# Altium PCB ESP8266SWITCHER.PcbDoc
Units mm, origin at the board's own origin, x right, y up, seen from the top; angles counter-clockwise.
Board outline 85 x 40 mm, 2 copper layers (Top Layer, Bottom Layer); 26 components, 25 nets, 96 pads, 49 vias.
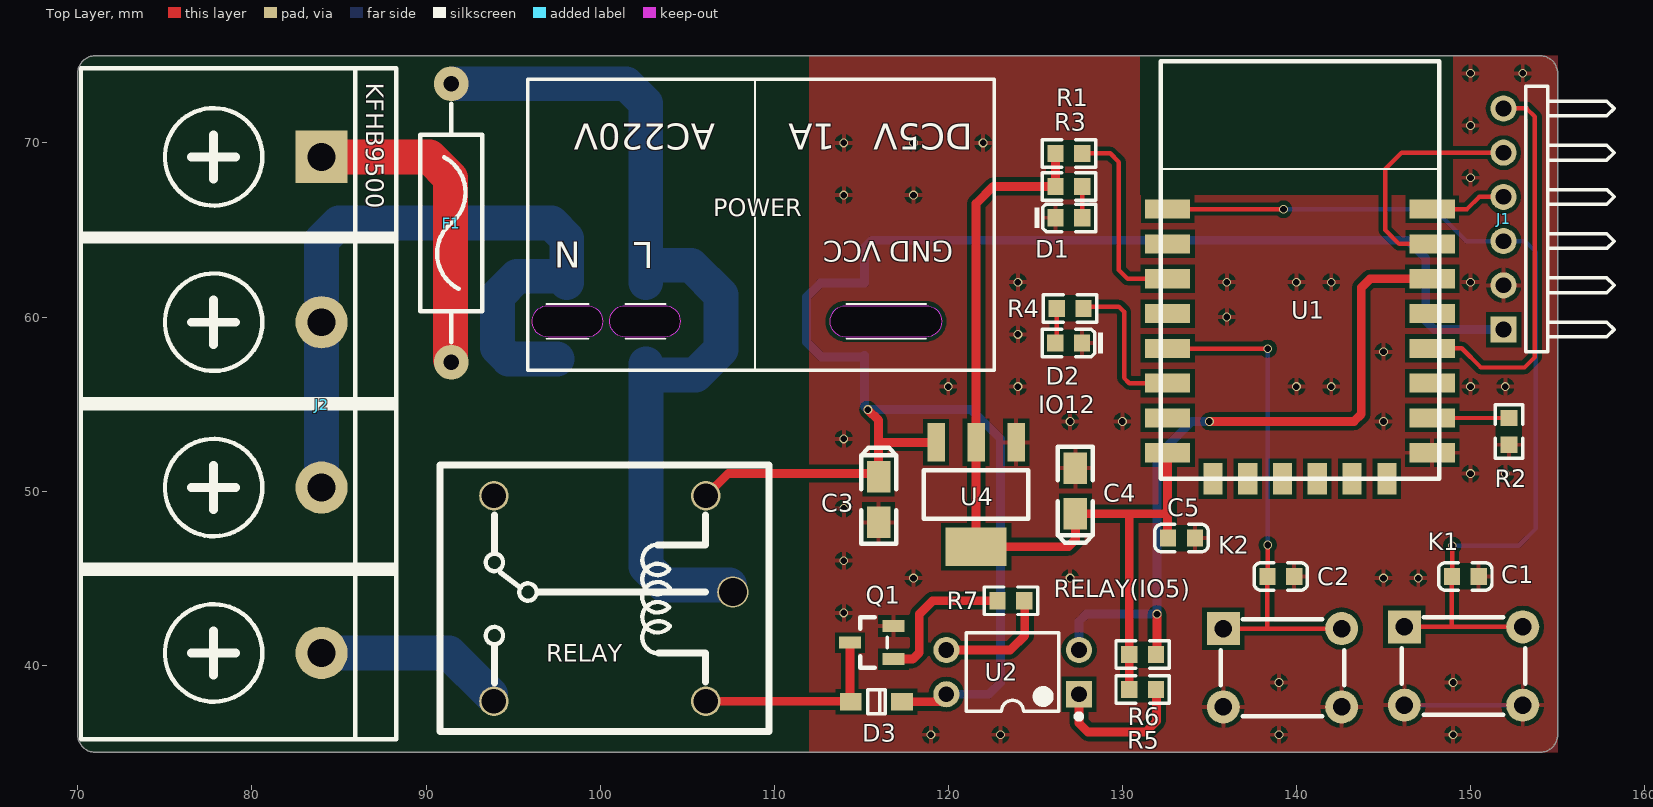
[diagram p0: Top Layer view]
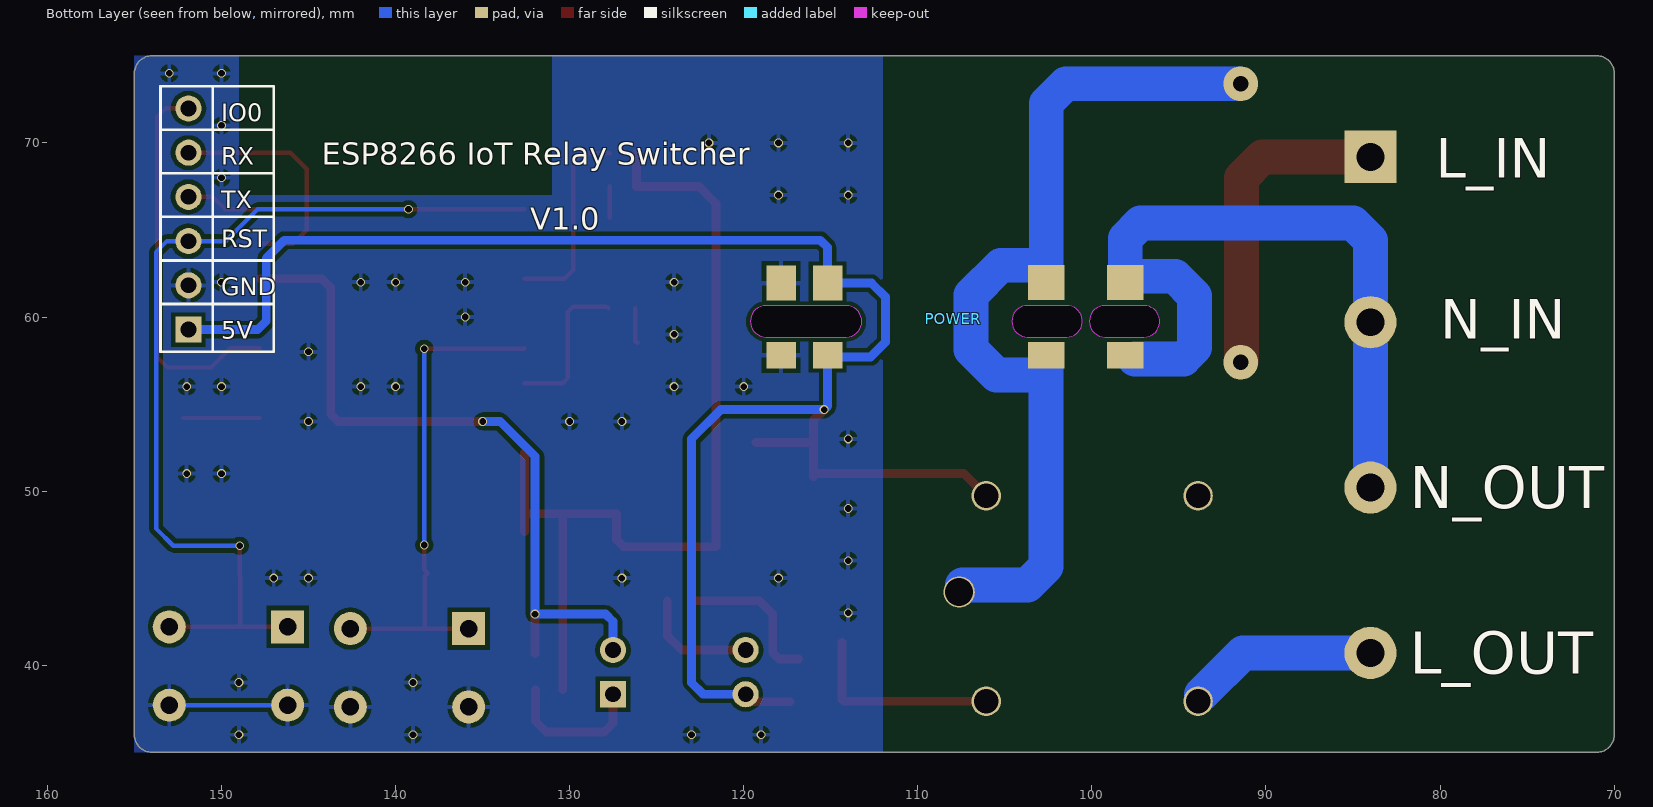
[diagram p1: Bottom Layer view, seen from below]

## Layer stack, top to bottom
Top Solder: solder mask 0.0102, Solder Resist, Dk 3.5
Top Layer: signal copper 0.0356
Dielectric 1: dielectric 0.32, FR-4, Dk 4.8
Bottom Layer: signal copper 0.0356
Bottom Solder: solder mask 0.0102, Solder Resist, Dk 3.5

## Board outline
70,35.888 ccw(c71,36) 70.888,35 70.9,35 154.1,35 154.112,35 ccw(c154,36) 155,35.888 155,74.112 ccw(c154,74) 154.112,75 154.1,75 70.9,75 70.888,75 ccw(c71,74) 70,74.112 70,74.1

## Design rules (kind name [scope] priority, off if disabled: settings)
Clearance [All] p1: gap=0.254 ignorepadtopadclearanceinfootprint=FALSE except(0: Arc-Hole Track-Hole SMDPad-Hole THPad-Hole Via-Hole Fill-Hole Poly-Hole Region-Hole Text-Hole)
PolygonConnect [All] p1: connectstyle=Relief reliefconductorwidth=0.254 reliefentries=4 polygonreliefangle="90 Angle" airgapwidth=0.254
RoutingVias [All] p1: holewidth=0.711 width=1.27 viastyle="Through Hole" minholewidth=0.711 minwidth=1.27 maxholewidth=0.711 maxwidth=1.27
SolderMaskExpansion [All] p1: expansion=0.102
Width [All] p1: maxlimit=2 minlimit=0.254 preferedwidth=0.254
30 further rules are at their usual default settings.

## Components (designator, comment, footprint, x,y, rotation, side; value= is the part's Value field where it differs from the comment)
C1 "100nF (104) 10% 50V" LC-0603_C 149.7,45.1 r0 top
C2 "100nF (104) 10% 50V" LC-0603_C 139.1,45.1 r0 top
C3 "10uF (106) ±10% 16V" LC-CASE-A_3216 116,49.51 r90 top
C4 "10uF (106) ±10% 16V" LC-CASE-A_3216 127.3,50.01 r270 top
C5 "100nF (104) 10% 50V" LC-0603_C 133.4,47.299 r180 top
D1 "红灯 0603" LC-0603_LED_S1 126.93,65.7 r0 top
D2 "绿灯 0603" LC-0603_LED_S1 126.92,58.51 r180 top
D3 "1N4148W" SOD-123 115.87,37.9 r180 top
F1 "FUSE" FUSE-4X16 91.45,57.4 r90 top
J1 "Pin HDR1X6" "Pin HDR1X6/2.54mm-W" 151.9,59.28 r90 top
J2 "KFHB9500-4P" KFHB9500-4P 84,69.2 r270 top
K1 "KEY" DIP-6X6X7 146.2,42.2 r0 top
K2 "KEY" DIP-6X6X7 135.8,42.1 r0 top
POWER "220V~5V" RPD220V-5V-1A 108.4,64 r180 top locked
Q1 "SS8050 Y1" SOT-23(SOT-23-3) 115.6,41.3 r0 top
R1 "10KΩ (1002) ±1%" LC-0603_R 126.93,69.4 r0 top
R2 "10KΩ (1002) ±1%" LC-0603_R 152.2,53.43 r270 top
R3 "10KΩ (1002) ±1%" LC-0603_R 126.93,67.5 r0 top
R4 "10KΩ (1002) ±1%" LC-0603_R 127,60.5 r180 top
R5 "1KΩ (1001) ±1%" LC-0603_R 131.17,38.6 r0 top
R6 "10KΩ (1002) ±1%" LC-0603_R 131.17,40.603 r180 top
R7 "1KΩ (1001) ±1%" LC-0603_R 123.6,43.7 r180 top
RELAY "RELAY" TONGLING-5V 99.8,44.2 r0 top
U1 "12E&F" ESP8266-12E&F 139.922,61.415 r0 top locked
U2 "PC817C" DIP-4 123.7,39.6 r180 top
U4 "NCP1117ST33T3G" SOT-223 121.6,49.8 r90 top

## Footprints (in the part's own frame and the unit in brackets; to place one, negate y for a bottom-side part, rotate by r counter-clockwise, add the part's x,y. Pads: shape width x height; smd on the part's side, far side on the other; paste and mask are expansions set on the pad)
DIP-4 [mm]
  rect 1.5x1.5 hole 0.9: 1(-3.81,1.27)
  round 1.5 hole 0.9: 2(-3.81,-1.27) 3(3.81,-1.27) 4(3.81,1.27)
  silkscreen extent -3.95,-2.25 2.66,2.7, body extent -4,-2.67 4,2.87, height 4.31
DIP-6X6X7 [mm]
  rect 1.9x1.9 hole 1: 1(0,0)
  round 1.9 hole 1: 1(6.8,0) 3(0,-4.5) 3(6.8,-4.5)
  silkscreen extent -0.16,-5.04 6.96,0.54, body extent -0.68,-5.21 7.53,0.79, height 6.95
ESP8266-12E&F [mm]
  rect 2.6x1.1 smd: 1(-7.322,4.785) 2(-7.322,2.785) 3(-7.322,0.785) 4(-7.322,-1.215) 5(-7.322,-3.215) 6(-7.322,-5.215) 7(-7.322,-7.215) 8(-7.322,-9.215) 15(7.878,-9.215) 16(7.878,-7.215) 17(7.878,-5.215) 18(7.878,-3.215) 19(7.878,-1.215) 20(7.878,0.785) 21(7.878,2.785) 22(7.878,4.785)
  rect 1.1x1.8 smd: 9(-4.722,-10.715) 10(-2.722,-10.715) 11(-0.722,-10.715) 12(1.278,-10.715) 13(3.278,-10.715) 14(5.278,-10.715)
  silkscreen extent -7.72,-10.71 8.28,13.28, body extent -7.8,-10.79 8.2,13.59, height 3.06
FUSE-4X16 [mm]
  round 2 hole 0.9: 1(0,0) 2(16,0)
  silkscreen extent 1.14,-1.78 14.86,1.78, body extent -0.43,-1.87 16.17,2.03, height 3.95
KFHB9500-4P [mm]
  rect 3x3 hole 1.6: 1(0,0)
  round 3 hole 1.6: 2(9.5,0) 3(19,0) 4(28.5,0)
  silkscreen extent -5.08,-13.82 33.45,4.3, body extent -5.21,-13.7 33.29,4.3, height 14.05
LC-0603_C [mm]
  rect 0.93x0.98 smd: 1(-0.77,0) 2(0.77,0)
  silkscreen extent -1.53,-0.79 1.54,0.79, body extent -0.8,-0.4 0.8,0.4, height 0.3
LC-0603_LED_S1 [mm]
  rect 0.93x0.98 smd: A(0.77,0) K(-0.77,0)
  silkscreen extent -1.97,-0.79 1.54,0.79, body extent -0.8,-0.4 0.8,0.4, height 0.6
LC-0603_R [mm]
  rect 0.93x0.98 smd: 1(-0.77,0) 2(0.77,0)
  silkscreen extent -1.53,-0.79 1.54,0.79, body extent -0.85,-0.4 0.85,0.4, height 0.56
LC-CASE-A_3216 [mm]
  rect 1.8x1.35 smd: 1(1.31,0) 2(-1.31,0)
  silkscreen extent -2.54,-1 2.97,1, body extent -1.7,-0.84 1.7,0.84, height 1.71
"Pin HDR1X6/2.54mm-W" [mm] "Connector; Header; 6 Position; Right Angle"
  rect 1.5x1.5 hole 0.9: 1(0,0)
  round 1.5 hole 0.9: 2(2.54,0) 3(5.08,0) 4(7.62,0) 5(10.16,0) 6(12.7,0)
  silkscreen extent -1.27,-6.35 13.97,-1.27, body extent -1.27,-9.97 13.97,0.38, height 2.54
RPD220V-5V-1A [mm]
  rect 1.7x2 smd far side mask+0.102: GND(-9.45,2.05) VCC(-6.78,2.05)
  rect 1.7x1.5 smd far side mask+0.102: GND(-9.45,6.2) VCC(-6.78,6.2)
  rect 2.1x1.5 smd far side mask+0.102: L(5.77,6.2) N(10.32,6.2)
  rect 2.1x2 smd far side mask+0.102: L(5.775,2.025) N(10.315,2.025)
  Keep-Out Layer board cut-out: -10.33,3.35 -10.776,3.474 -11.101,3.803 -11.22,4.25 -11.101,4.697 -10.776,5.026 -10.33,5.15 -10.33,5.15 -10.33,5.15 -5.7,5.15 -5.254,5.026 -4.929,4.697 -4.81,4.25 -4.929,3.803 -5.254,3.474 -5.7,3.35 -5.7,3.35 -5.7,3.35
  Keep-Out Layer board cut-out: 4.7,3.34 4.249,3.463 3.919,3.794 3.799,4.245 3.919,4.696 4.249,5.027 4.7,5.15 4.7,5.15 6.95,5.15 7.343,5.06 7.658,4.809 7.832,4.446 7.832,4.044 7.658,3.681 7.343,3.43 6.95,3.34 6.95,3.34
  Keep-Out Layer board cut-out: 9.14,3.35 8.694,3.474 8.369,3.803 8.25,4.25 8.369,4.697 8.694,5.026 9.14,5.15 9.14,5.15 11.39,5.15 11.39,5.15 11.784,5.064 12.101,4.815 12.277,4.452 12.277,4.048 12.101,3.685 11.784,3.436 11.39,3.35 11.39,3.35
  silkscreen extent -14.25,-9.65 12.55,7.05, body extent -14.34,-10.65 12.66,6.85, height 16.85
SOD-123 [mm]
  rect 1.25x1 smd: 1(1.475,0) 2(-1.475,0)
  silkscreen extent -0.5,-0.7 0.5,0.7, body extent -1.85,-0.77 1.85,0.78, height 1.35
SOT-23(SOT-23-3) [mm]
  rect 1.25x0.7 smd: 1(1.25,-0.95) 2(1.25,0.95) 3(-1.25,0)
  silkscreen extent -0.65,-1.46 0.9,1.46, body extent -1.5,-1.5 1.5,1.5, height 1.3
SOT-223 [mm]
  rect 2.2x1 smd: 1(3,-2.3) 2(3,0) 3(3,2.3)
  rect 2.2x3.5 smd: 2(-3,0)
  silkscreen extent -1.4,-3 1.4,3, body extent -3.49,-3.24 3.49,3.24, height 1.64
TONGLING-5V [mm]
  round 1.7 hole 1.4: G(6.275,-6.275) NC(-5.9,5.525) NO(-5.9,-6.275) V(6.275,5.525)
  round 1.8 hole 1.6: S(7.825,0)
  silkscreen extent -9,-8 9.9,7.3, body extent -8.98,-7.97 10.02,7.13, height 15

## Part data
C1 C2 C5: library part "0603 100nF (104) 10% 50V", "贴片电容", Package=0603, SuppliersPartNumber=C14663, ComponentLink1Description=供应商链接, ComponentLink1URL=http://www.szlcsc.com/product/details_15331.html, Supplier=LC
C3 C4: library part "3216 10uF (106) 10% 16V", "钽电容", Package=3216, SuppliersPartNumber=C7171, ComponentLink1Description=供应商链接, ComponentLink1URL=http://www.szlcsc.com/product/details_7643.html, Supplier=LC
D1: library part "0603 红灯", "发光二极管", Package=0603, SuppliersPartNumber=C2286, ComponentLink1Description=供应商链接, ComponentLink1URL=http://www.szlcsc.com/product/details_2659.html, Supplier=LC
D2: library part "0603 绿灯", "发光二极管", Package=0603, SuppliersPartNumber=C72043, ComponentLink1Description=供应商链接, ComponentLink1URL=http://www.szlcsc.com/product/details_73152.html, Supplier=LC
D3: library part 1N4148_SOD-123, "二极管", ComponentLink1Description=供应商链接, ComponentLink1URL=https://item.szlcsc.com/116348.html, 供应商=嘉立创, 供应商编号=C115103, 封装=SOD-123
POWER: library part 瑞普达220V转5V-1A
Q1: library part "SOT-23 SS8050 Y1", "三极管", Package=SOT-23, SuppliersPartNumber=C2150, ComponentLink1Description=供应商链接, ComponentLink1URL=http://www.szlcsc.com/product/details_2507.html, Supplier=LC
R1 R2 R3 R4 R6: library part "0603 10KΩ (1002) 1%", "贴片电阻", Package=0603, SuppliersPartNumber=C25804, ComponentLink1Description=供应商链接, ComponentLink1URL=http://www.szlcsc.com/product/details_26547.html, Supplier=LC
R5 R7: library part "0603 1KΩ (1001) 1%", "贴片电阻", Package=0603, SuppliersPartNumber=C21190, ComponentLink1Description=供应商链接, ComponentLink1URL=http://www.szlcsc.com/product/details_21904.html, Supplier=LC
RELAY: library part TONGLING-RELAY-5V, "5V 一组转换 JQC-3FF-S-Z", 购买链接=https://item.taobao.com/item.htm?spm=a1z10.1-c.w4004-18430098939.12.77ac2a94UoBjtF&id=542806001990
U1: library part ESP8266-12E&F
U2: library part "PC817C DIP4", "PC817C  光耦", ComponentLink2Description=供应商链接, ComponentLink2URL=https://item.szlcsc.com/116748.html, 供应商=嘉立创, 供应商编号=C115500, 封装=DIP-4
U4: "NCP1117, NCV1117. 1.0 A Low-Dropout Positive  Fixed and Adjustable  Voltage Regulators", ComponentLink1Description=供应商链接, ComponentLink1URL=https://item.szlcsc.com/27282.html, 供应商=嘉立创, 供应商编号=C26537, 封装=SOT-223

## Via types
v1: diameter 0.508, hole 0.381, Top Layer to Bottom Layer, tented both sides, 49 vias

## Nets (pads, with @x,y where several pads share a name; then routed paths per layer and width w, separated by ;. In a path a pad name is that pad's centre, name@x,y a point inside that pad or via, vN(x,y) a via of type N, cw(c..) or ccw(c..) an arc to the next point about the centre after c; other vN are vias at no path point)
GND: C1.2 C2.2 C3.2 C4.2 C5.1 D1.K D2.K J1.2 K1.3 K2.3 POWER.GND Q1.2 R2.2 U1.15 U4.1 | length 6.8
  Bottom Layer w0.254: K1.3@146.2,37.7 K1.3@153,37.7
  other v1: 119,36 123,36 139,36 149,36 139,39 149,39 114,43 118,45 127,45 145,45 147,45 114,46 114,49 150,51 152,51 114,53 127,54 130,54 145,54 120,56 124,56 140,56 142,56 150,56 152,56 145,58 124,59 136,60 124,62 136,62 140,62 142,62 150,62 114,67 118,67 150,68 114,70 118,70 122,70 150,71 150,74 153,74
IO0: J1.6 U1.18 | length 22.4
  Top Layer w0.254: U1.18 149.5,58.2 150.6,57.1 153.1,57.1 153.7,57.7 153.7,71.5 153.22,71.98 J1.6
IO2: U1.17
IO4: U1.19
IO5: R6.1 U1.20 U2.2 | length 42
  Top Layer w0.254: R6.1 R6.1@131.99,40.653 ; 143.3,54 143.31,54.01
  Top Layer w0.508: R6.1@131.99,40.653 v1(131.99,42.93) ; v1(135,54) 136.35,54 143.3,54 ; 143.31,54.01 143.72,54.42 143.72,61.69 144.23,62.2 U1.20
  Bottom Layer w0.508: U2.2 127.51,42.51 127.93,42.93 v1(131.99,42.93) 131.99,51.99 134,54 v1(135,54)
IO12: R4.1 U1.6 | length 8.9
  Top Layer w0.254: R4.1 127.87,60.6 129.8,60.6 130.1,60.3 130.1,56.5 130.4,56.2 U1.6
IO13: U1.7
IO14: C2.1 K2.1 U1.5 | length 28.8
  Top Layer w0.254: U1.5 132.62,58.18 v1(138.35,58.18) ; K2.1@135.8,42.1 138.32,42.1 ; v1(138.35,46.9) 138.35,45.48 138.15,45.28 C2.1 138.33,42.11 138.32,42.1 ; K2.1@142.6,42.1 138.32,42.1
  Bottom Layer w0.254: v1(138.35,46.9) v1(138.35,58.18)
IO15: R2.1 U1.16 | length 4.4
  Top Layer w0.254: U1.16 R2.1
KEY1: C1.1 J1.3 K1.1 U1.1 | length 54.8
  Top Layer w0.254: U1.1 139.25,66.2 v1(139.26,66.19) ; K1.1@146.2,42.2 148.89,42.2 ; v1(148.95,46.86) 148.95,45.12 C1.1 148.93,42.24 148.89,42.2 ; K1.1@153,42.2 148.89,42.2
  Bottom Layer w0.254: v1(139.26,66.19) 147.93,66.19 149.76,64.36 J1.3 153.13,64.36 153.76,63.73 153.76,47.85 152.77,46.86 v1(148.95,46.86)
L: F1.1 J2.1 | length 18.3
  Top Layer w2: J2.1 90.2,69.2 91.41,67.99 F1.1@91.41,57.56
L_IN: F1.2 POWER.L RELAY.S | length 50.4
  Bottom Layer w2: F1.2@91.6,73.4 101.5,73.4 102.625,72.275 POWER.L@102.625,61.975 ; POWER.L@102.63,57.31 102.63,45.67 103.7,44.6 RELAY.S@107.425,44.6 ; 102.94,56.67 105.48,56.67 106.94,58.13 106.94,61.27 105.24,62.97 POWER.L@103.62,62.97
L_OUT: J2.4 RELAY.NO | length 10.7
  Bottom Layer w2: J2.4 91.325,40.7 RELAY.NO@93.7,38.325
N: J2.2 J2.3 POWER.N | length 42.9
  Bottom Layer w2: J2.3 J2.2 84,64.4 85,65.4 97.2,65.4 98.085,64.515 98.085,61.975 97.72,62.34 95.23,62.34 94.1,61.21 94.1,58.24 94.745,57.595 POWER.N@97.525,57.595
NetD1_A: D1.A R3.2 | length 1.8
  Top Layer w0.254: D1.A R3.2
NetD2_A: D2.A R4.2 | length 2
  Top Layer w0.254: D2.A@126.09,58.51 D2.A@126.16,58.58 ; D2.A@126.23,58.57 R4.2
NetD3_1: D3.1 Q1.3 RELAY.G | length 11.6
  Top Layer w0.254: D3.1@114.25,37.925 114.325,38 D3.1@114.35,38.025
  Top Layer w0.508: RELAY.G D3.1@114.25,37.925 ; D3.1@114.35,38.025 Q1.3
NetQ1_1: Q1.1 R7.2 | length 8.7
  Top Layer w0.508: Q1.1 117.96,40.35 118.33,40.72 118.33,42.93 119.1,43.7 R7.2
NetR1_2: R1.2 U1.3 | length 11.5
  Top Layer w0.254: R1.2 129.3,69.4 129.8,68.9 129.8,62.7 130.3,62.2 U1.3
NetR5_2: R5.2 U2.1 | length 8.4
  Top Layer w0.254: R5.2 R5.2@131.97,38.57
  Top Layer w0.508: U2.1 127.51,36.67 128.02,36.16 131.34,36.16 131.97,36.79 R5.2@131.97,38.57
NetR7_1: R7.1 U2.3 | length 6.9
  Top Layer w0.254: R7.1 R7.1@124.39,43.68
  Top Layer w0.508: U2.3 123.56,40.87 124.39,41.7 R7.1@124.39,43.68
RX: J1.5 U1.21 | length 13.7
  Top Layer w0.254: U1.21 145.9,64.2 145.1,65 145.1,68.5 146.04,69.44 J1.5
TX: J1.4 U1.22 | length 4.4
  Top Layer w0.254: U1.22 149.8,66.2 150.5,66.9 J1.4
VCC3V3: C4.1 C5.2 R1.1 R3.1 R5.1 R6.2 U1.8 U4.2 | length 53.9
  Top Layer w0.508: R1.1 R3.1 122.58,67.5 121.6,66.52 121.6,52.8 121.6,46.8 126.9,46.8 127.3,47.2 C4.1 130.3,48.7 ; R5.1 R6.2 130.4,48.6 130.3,48.7 ; C5.2@132.6,47.669 132.6,48.7 ; U1.8 132.6,48.7 ; 130.3,48.7 132.6,48.7
VCC5V: C3.1 D3.2 J1.1 POWER.VCC RELAY.V U2.4 U4.3 | length 102.7
  Top Layer w0.254: U2.4@119.46,37.9 U2.4
  Top Layer w0.508: RELAY.V 107.36,51.01 115.81,51.01 C3.1 116,54.06 v1(115.38,54.68) ; 116.005,52.755 116.05,52.8 U4.3 ; D3.2 U2.4@119.46,37.9
  Bottom Layer w0.508: U2.4 122.33,38.33 123,39 123,53 121.32,54.68 v1(115.38,54.68) 115.18,54.88 115.18,57.8 115.09,57.71 112.71,57.71 111.85,58.57 111.85,61.14 112.66,61.95 115.18,61.95 115.18,63.99 115.6,64.41 146.39,64.41 147.43,63.37 147.43,59.77 147.92,59.28 J1.1
pads on no net: RELAY.NC U1.2 U1.4 U1.9 U1.10 U1.11 U1.12 U1.13 U1.14

## Polygon pours and split planes (outlines as drawn)
GND on Bottom Layer "B-GND" (solid, pour order 0): 112,75 131,75 131,67 149,67 149,75 155,75 155,35 112,35
GND on Top Layer "B-GND" (solid, pour order 1): 112,75 131,75 131,67 149,67 149,75 155,75 155,35 112,35

## Silkscreen, mask and mechanical layers (free items; w line width, h text height)
Top Overlay:
  text "IO12" at 125.158,54.469 h1.02
  text "RELAY(IO5)" at 126.07,43.914 h1.02
Bottom Overlay:
  lines w0.152: 147,60.75 153.5,60.75 ; 147,63.25 153.5,63.25 ; 147,65.75 153.5,65.75 ; 147,68.25 153.5,68.25 ; 147,70.75 153.5,70.75 ; 150.5,58 150.5,73.25 ; 147,58 153.5,58 153.5,73.25 147,73.25 147,58
  text "IO0" at 150,71.25 h1.02
  text "ESP8266 IoT Relay Switcher" at 144.25,68.75 h1.27
  text "RX" at 150,68.75 h1.02
  text "L_IN" at 80.25,68 h2.29
  text "TX" at 150,66.25 h1.02
  text "V1.0" at 132.25,65 h1.27
  text "RST" at 150,64 h1.02
  text "GND" at 150,61.25 h1.02
  text "N_IN" at 80,58.75 h2.29
  text "5V" at 150,58.75 h1.02
  text "N_OUT" at 81.75,49 h2.41
  text "L_OUT" at 81.75,39.5 h2.41
Mechanical 1:
  lines w0.2: 70,35.9 70,74.1 ; 70.9,35 154.1,35 ; 70.9,75 154.1,75 ; 155,35.9 155,74.1
Mechanical 13:
  lines w0.2: 70,35.888 ccw(c71,36) 70.888,35 ; 70,74.112 cw(c71,74) 70.888,75 ; 154.112,35 ccw(c154,36) 155,35.888 ; 154.112,75 cw(c154,74) 155,74.112

## Dimensions
70,35 to 155,35 on Mechanical 15
155,75 to 155,35 on Mechanical 15

## Text inside footprints (layer, text, board x,y; h text height)
J2: Top Overlay "KFHB9500" at 86.563,73.467 h1.02 r270
POWER: Top Overlay "1A" at 113.5,71.6 h2.54 r180; Top Overlay "DC5V" at 121.4,71.6 h2.54 r180; Top Overlay "AC220V" at 106.6,71.6 h2.54 r180; Top Overlay "GND" at 120.275,64.75 h2 r180; Top Overlay "VCC" at 116.15,64.75 h2 r180; Top Overlay "L" at 103.07,64.79 h2.54 r180; Top Overlay "N" at 98.9,64.8 h2.54 r180